# Altium PCB SimpleLDOConverter.PcbDoc
Units mm, origin at the board's own origin, x right, y up, seen from the top; angles counter-clockwise.
Board outline 23.5 x 8 mm, 2 copper layers (Top Layer, Bottom Layer); 5 components, 3 nets, 17 pads, 5 vias.
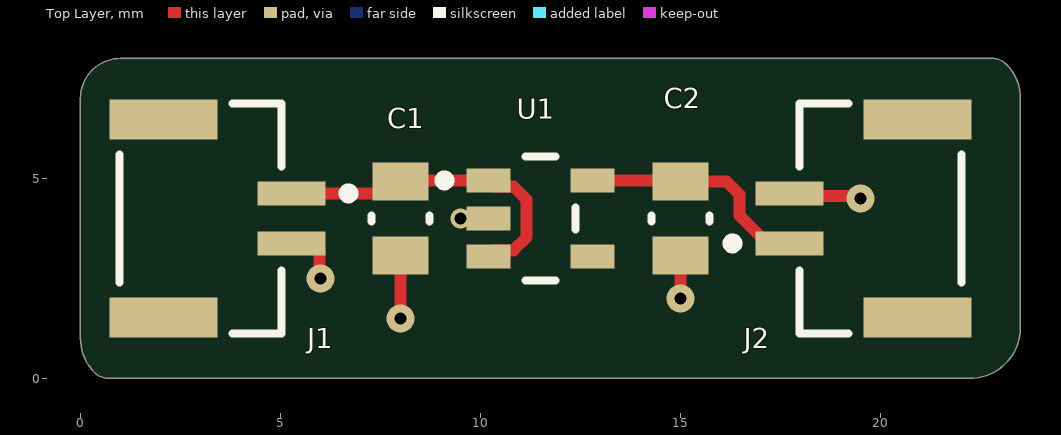
[diagram p0: Top Layer view]
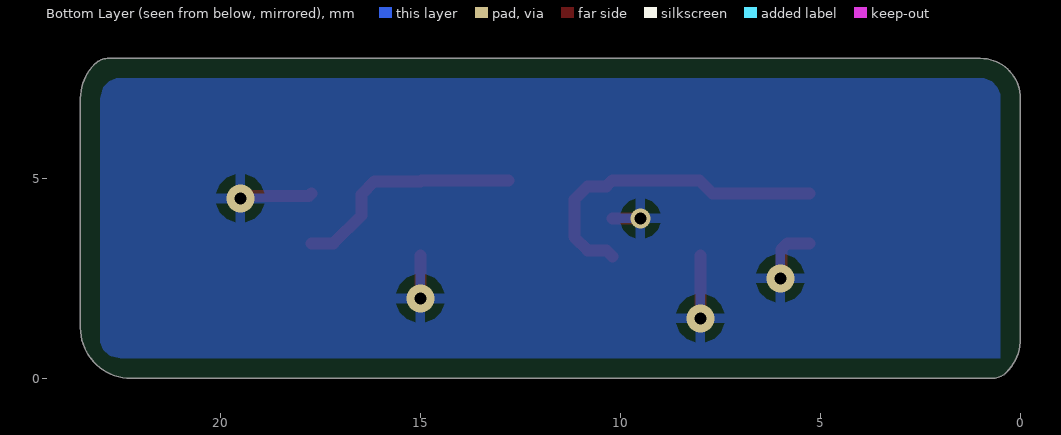
[diagram p1: Bottom Layer view, seen from below]
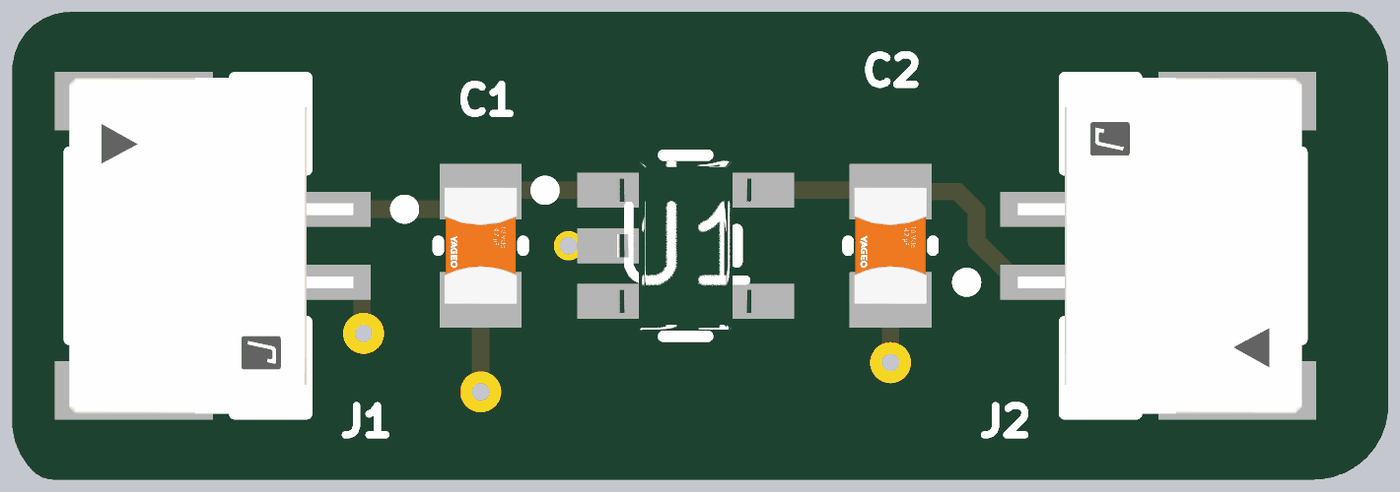
[diagram p2: 3D render of the assembled board from above, using the file's embedded part models]

## Layer stack, top to bottom
Top Solder: solder mask 0.0102, Solder Resist, Dk 3.5
Top Layer: signal copper 0.0356
Dielectric 1: dielectric 0.32, FR-4, Dk 4.8
Bottom Layer: signal copper 0.0356
Bottom Solder: solder mask 0.0102, Solder Resist, Dk 3.5

## Board outline
0.354,0.146 ccw(c0.707,0.5) 0.707,0 22.23,0 ccw(c22.23,1.27) 23.5,1.27 23.5,7 ccw(c22.293,7) 23.146,7.854 ccw(c22.793,7.5) 22.793,8 1,8 ccw(c1,7) 0,7 0,1 ccw(c1.207,1)

## Design rules (kind name [scope] priority, off if disabled: settings)
Clearance [All] p1: gap=0.254 ignorepadtopadclearanceinfootprint=FALSE
MinimumSolderMaskSliver [All] p1: minsoldermaskwidth=0.2
PolygonConnect [All] p1: connectstyle=Relief reliefconductorwidth=0.254 reliefentries=4 polygonreliefangle="90 Angle" airgapwidth=0.254
RoutingVias [All] p1: holewidth=0.711 width=1.27 viastyle="Through Hole" minholewidth=0.3 minwidth=0.5 maxholewidth=0.711 maxwidth=1.27
SilkToSolderMaskClearance [IsPad] p1: minsilkscreentomaskgap=0.15 clearancetoexposedcopper=TRUE
SolderMaskExpansion [All] p1: expansion=0 istentingtop=FALSE
SupplyNets "Schematic Supply Nets_2" [InNet('+3V3')] p1: voltage=0.000
SupplyNets "Schematic Supply Nets_1" [InNet('+5')] p2: voltage=0.000
SupplyNets "Schematic Supply Nets" [InNet('GND')] p3: voltage=0.000
Width [All] p1: maxlimit=0.5 minlimit=0.254 preferedwidth=0.3
28 further rules are at their usual default settings.

## Components (designator, comment, footprint, x,y, rotation, side; value= is the part's Value field where it differs from the comment)
C1 "1u" FP-CC0805-0_85-MFG 8,4 r270 top value="1 uF"
C2 "1u" FP-CC0805-0_85-MFG 15,4 r270 top value="1 uF"
J1 "SM02B-GHS-TB(LF)(SN)" FP-SM02B-GHS-TB_LF_SN-MFG 3,4 r270 top
J2 "SM02B-GHS-TB(LF)(SN)" FP-SM02B-GHS-TB_LF_SN-MFG 20,4 r90 top
U1 "MIC5317-3.3YD5-TR" FP-C04-1179-MFG 11.5,4 r0 top

## Footprints (in the part's own frame and the unit in brackets; to place one, negate y for a bottom-side part, rotate by r counter-clockwise, add the part's x,y. Pads: shape width x height; smd on the part's side, far side on the other; paste and mask are expansions set on the pad)
FP-C04-1179-MFG [mm]
  rect 1.1x0.6 smd paste+0 mask+0: 1(-1.3,0.95) 2(-1.3,0) 3(-1.3,-0.95) 4(1.3,-0.95) 5(1.3,0.95)
  silkscreen extent -2.52,-1.55 0.87,1.55, body extent -1.95,-1.65 1.95,1.65, height 0.25
FP-CC0805-0_85-MFG [mm]
  rect 0.95x1.4 smd paste+0 mask+0: 1(-0.925,0) 2(0.925,0)
  silkscreen extent -0.08,-0.72 0.08,0.72, body extent -1.6,-1.05 1.6,1.05, height 0.25
FP-SM02B-GHS-TB_LF_SN-MFG [mm]
  rect 0.6x1.7 smd paste+0 mask+0: 1(-0.625,2.275) 2(0.625,2.275)
  rect 1x2.7 smd paste+0 mask+0: 3(-2.475,-0.925) 4(2.475,-0.925)
  silkscreen extent -2.88,-2.02 2.88,3.83, body extent -3.08,-2.37 3.08,3.22, height 0.25

## Part data
C1 C2: library part CMP-03422-000182-1, "CAP CER 1UF 10V X7R 0805", Capacitance="1 uF", Manufacturer=Yageo, Manufacturer Part Number=CC0805KKX7R6BB105, Package=CC0805-0.85, Temperature="-30°C to +85°C", Temperature Characteristic=X7R, Temperature Range High=+85°C, Temperature Range Low=-30°C, Tolerance=0.1, Voltage Rating="10 V", Automotive=No, Category=Cap, ComponentLink2Description=Datasheet, ComponentLink2URL=http://www.yageo.com/documents/recent/UPY-GPHC_Y5V_6.3V-to-50V_8.pdf, Device Class L1="Passive Components", Device Class L2=Capacitors, Device Class L3="Ceramic Capacitors", Digikey Description="CAP CER 1UF 10V X7R 0805", Footprint Url=http://www.yageo.com/exep/pages/download/literatures/UPY-C_GEN_24.pdf, Height=0.95mm, Ipc Land Pattern Name=CAPC200125X85, Lead Free=Yes, Material=Ceramic, Mouser Description="Multilayer Ceramic Capacitors MLCC - SMD/SMT 1.0uF 10V X7R 10%", Octopart=https://octopart.com/cc0805kkx7r6bb105-yageo-42522859, RoHS=TRUE
J1 J2: library part CMP-2000-07076-2, "CONN HEADER SMD R/A 2POS 1.25MM", Color=Natural, Current Rating=1A, Package Quantity=2500, Voltage Rating=50V, Connector Type="Outer Shroud Contact", Contact Material=Bronze, Contact Plating=Tin, Contact Type="Male Pin", Fastening Type=Latch, Housing Color=Natural, Housing Material=Nylon, Lead Free="Lead Free", Mount="Surface Mount", Number of Contacts=2, Number of Positions=2, Number of Rows=1, Orientation="Right Angle", Packaging="Tape and Reel", Pitch=0.049inch, Series=GH, Termination=Solder
U1: library part CMP-00252-66802814-1, "MIC5317-3.3YD5-TR LDO Regulator Pos 3.3V 0.15A 5-Pin TSOT-23 T/R", Case/Package=SOT-23-5, Dropout Voltage=155mV, Max Input Voltage=6V, Max Junction Temperature (Tj)=150°C, Max Operating Temperature=125°C, Min Current Limit=200mA, Min Input Voltage=2.5V, Min Operating Temperature=-40°C, Min Supply Voltage=4.3V, Nominal Supply Current=29µA, Output Current=150mA, Output Voltage=3.3V, Power Supply Rejection Ratio (PSRR)=70dB, Accuracy=3%, Height=1mm, Lifecycle Status=Production, Max Supply Voltage=6V, Mount="Surface Mount", NexarPartId=66802814, Number of Outputs=1, Number of Regulators=1, RoHS=Compliant, Schedule B="8542390000, 8542390000"

## Via types
v1: diameter 0.7, hole 0.3, Top Layer to Bottom Layer, 4 vias
v2: diameter 0.5, hole 0.3, Top Layer to Bottom Layer, 1 vias

## Nets (pads, with @x,y where several pads share a name; then routed paths per layer and width w, separated by ;. In a path a pad name is that pad's centre, name@x,y a point inside that pad or via, vN(x,y) a via of type N, cw(c..) or ccw(c..) an arc to the next point about the centre after c; other vN are vias at no path point)
+3V3: C2.1 J2.1 U1.5 | length 5.9
  Top Layer w0.3: U1.5 14.975,4.95 C2.1 16.15,4.925 16.471,4.604 16.471,4.079 17.175,3.375 J2.1
+5: C1.1 J1.1 U1.1 U1.3 | length 8.3
  Top Layer w0.3: J1.1 7.7,4.625 C1.1 8.025,4.95 U1.1 10.35,4.8 10.821,4.8 11.154,4.467 11.154,3.533 10.821,3.2 10.35,3.2 U1.3
GND: C1.2 C2.2 J1.2 J2.2 U1.2 | length 6.7
  Top Layer w0.3: J1.2 5.825,3.375 5.975,3.225 5.975,2.525 v1(6,2.5) ; v1(8,1.5) C1.2 ; v2(9.5,4) U1.2 ; v1(15,2) C2.2 ; J2.2 17.788,4.562 19.437,4.562 v1(19.5,4.5)
pads on no net: J1.3 J1.4 J2.3 J2.4 U1.4

## Polygon pours and split planes (outlines as drawn)
GND on Bottom Layer "GND_L02_P001" (solid, pour order 1): 0.5,7 cw(c1,7) 1,7.5 22.5,7.5 cw(c22.5,7) 23,7 23,1 cw(c22.5,1) 22.5,0.5 0.5,0.5 0.5,3.5

## Silkscreen, mask and mechanical layers (free items; w line width, h text height)
Mechanical 1:
  lines w0.254: 0,1 ccw(c1.207,1) 0.354,0.146 ccw(c0.707,0.5) 0.707,0 10.5,0 22.23,0 ccw(c22.23,1.27) 23.5,1.27 23.5,7 ccw(c22.293,7) 23.146,7.854 ccw(c22.793,7.5) 22.793,8 1,8 ccw(c1,7) 0,7 0,1